# Altium PCB TailLightPrototypeRev3.PcbDoc
Units mil, origin at the board's own origin, x right, y up, seen from the top; angles counter-clockwise.
Board outline 1955 x 1400 mil, 2 copper layers (Top Layer, Bottom Layer); 27 components, 41 nets, 74 pads, 8 vias.
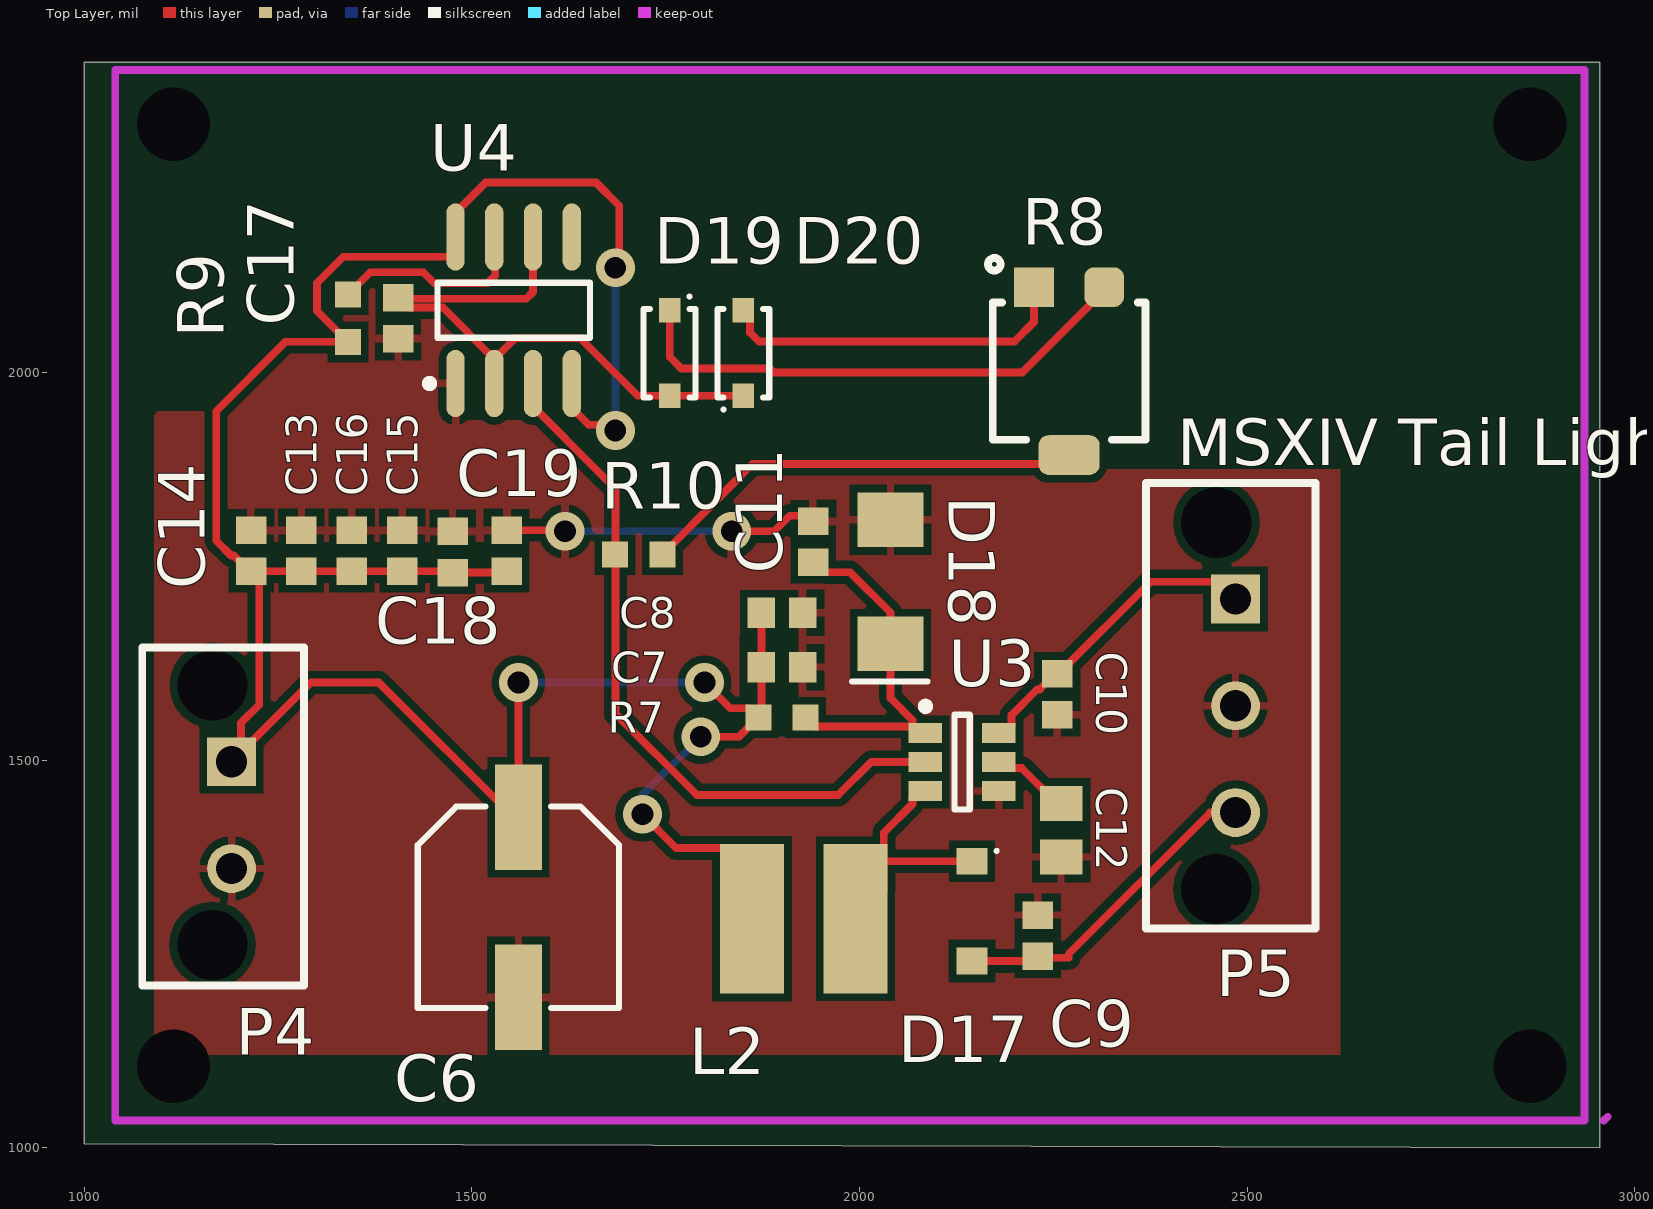
[diagram p0: Top Layer view]
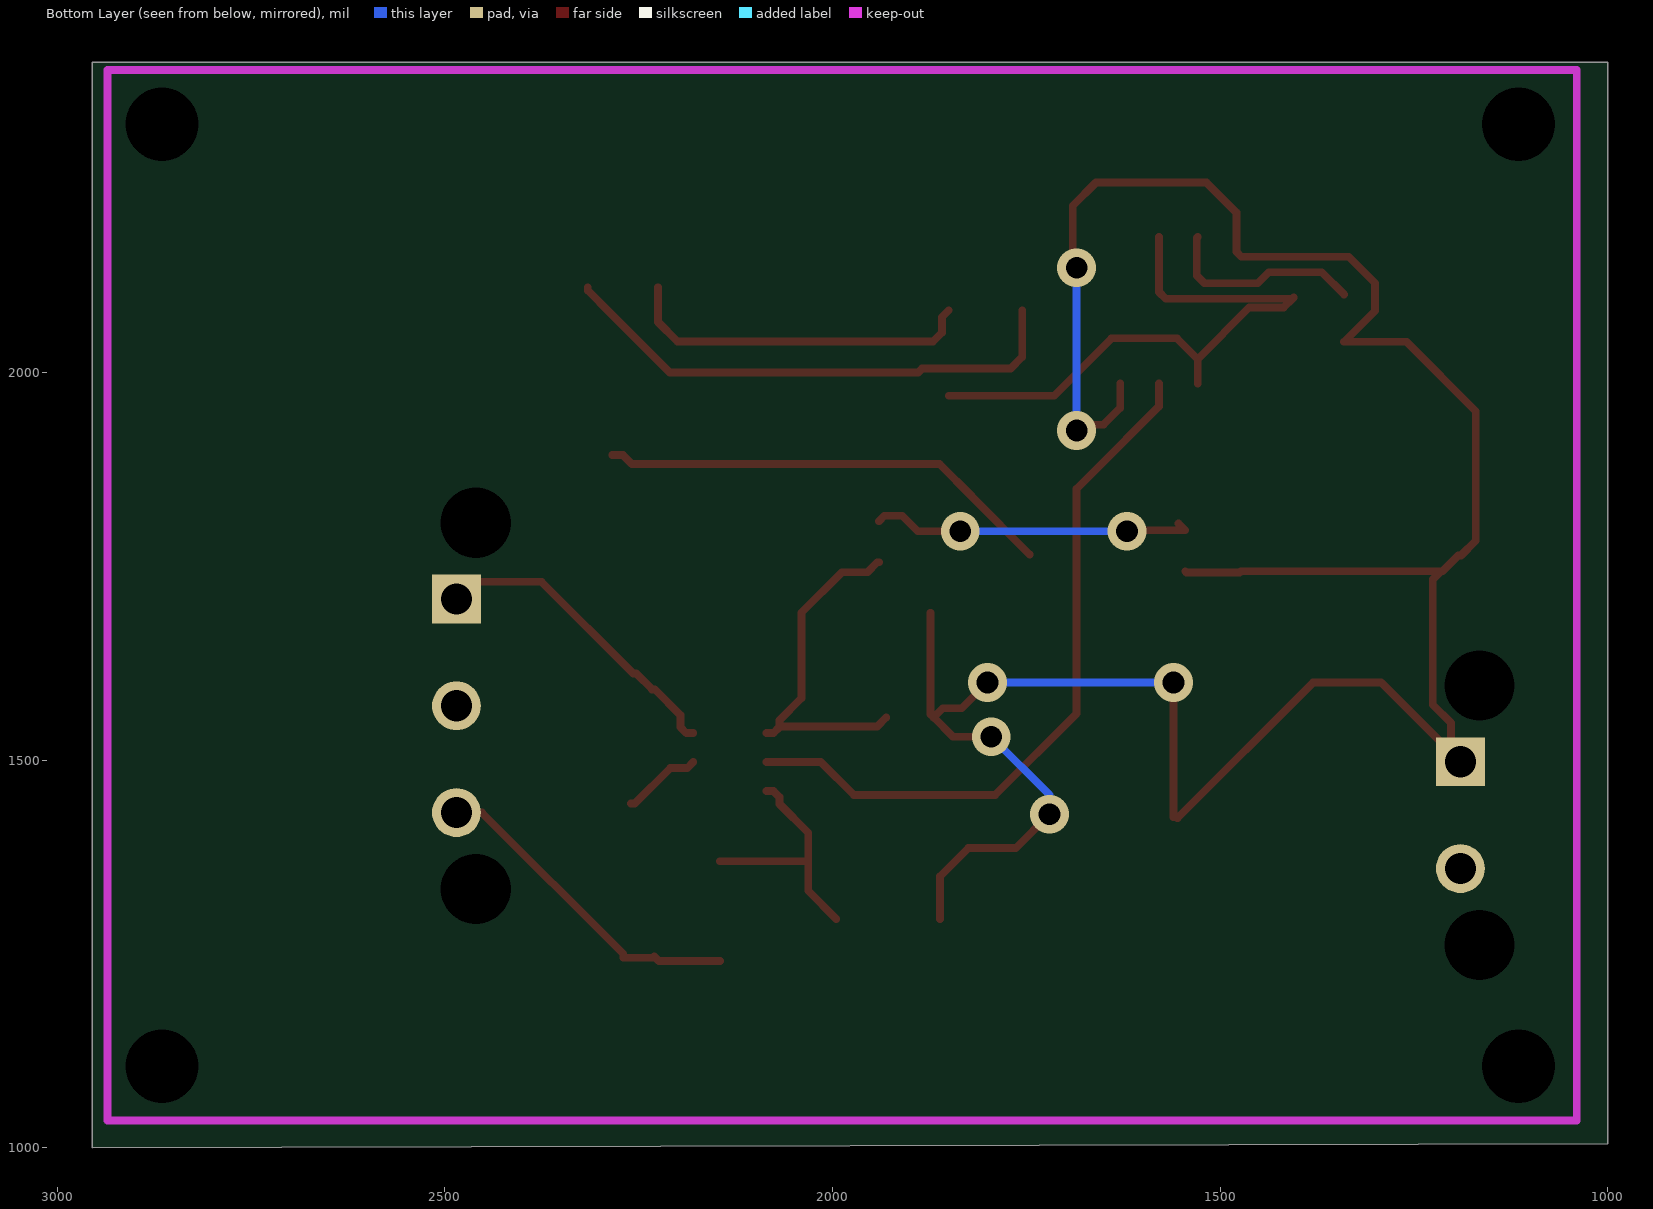
[diagram p1: Bottom Layer view, seen from below]
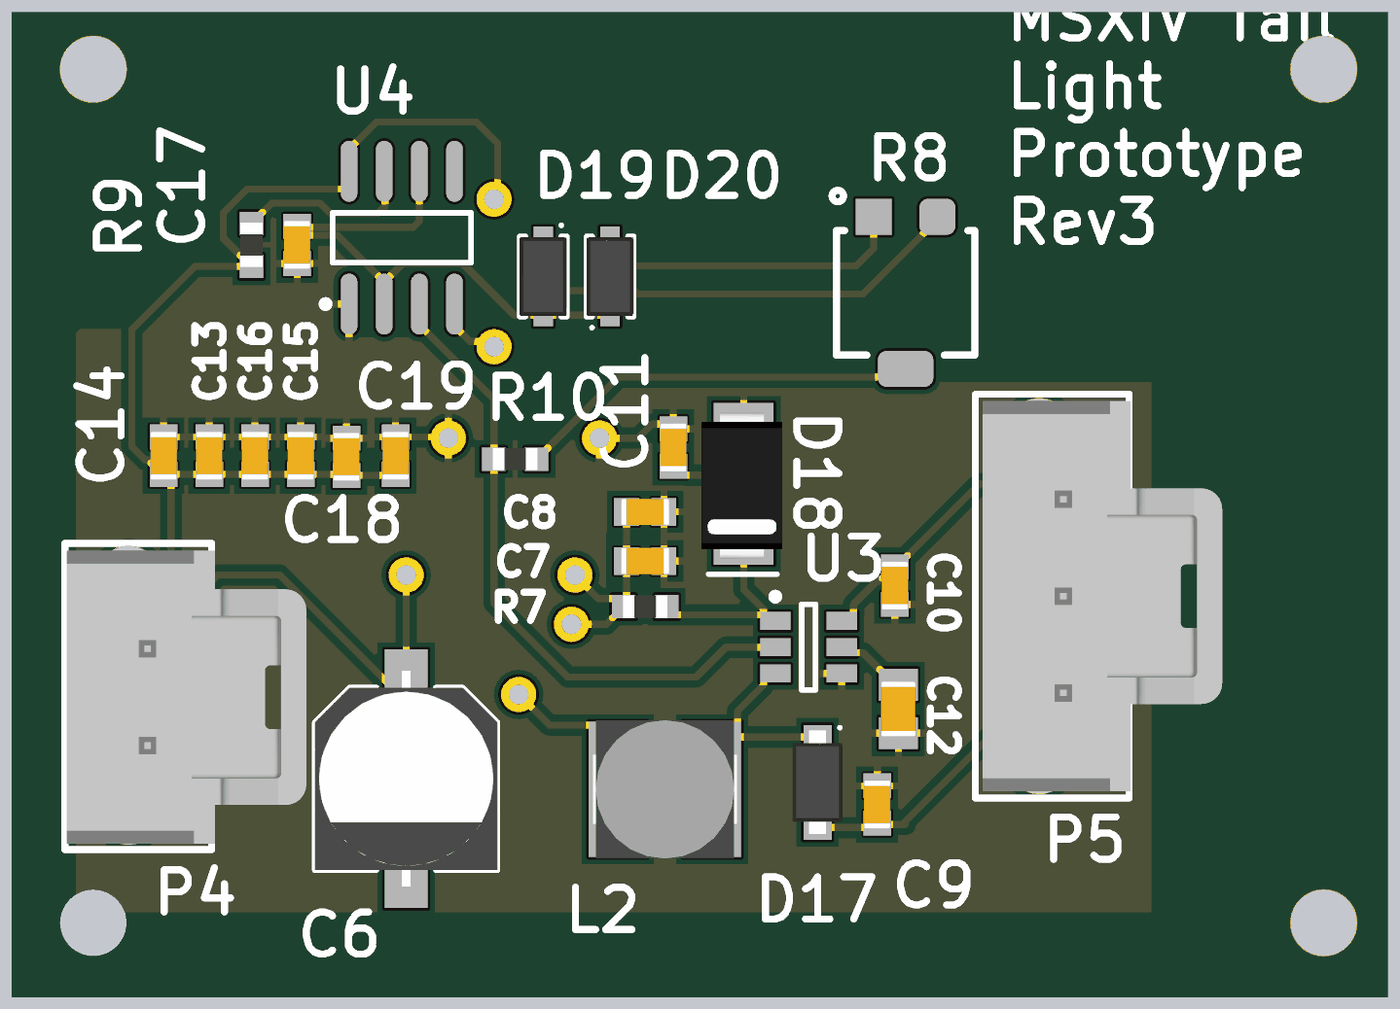
[diagram p2: 3D render of the assembled board from above, using the file's embedded part models]

## Layer stack, top to bottom
Top Solder: solder mask 0.4, Solder Resist, Dk 3.5
Top Layer: signal copper 1.4
Dielectric 1: dielectric 12.6, FR-4, Dk 4.8
Bottom Layer: signal copper 1.4
Bottom Solder: solder mask 0.4, Solder Resist, Dk 3.5

## Board outline
1000,1005 1000,2400 2955,2400 2955,1000
cut-out: 1030,2400

## Design rules (kind name [scope] priority, off if disabled: settings)
Clearance [All] p1: gap=10 ignorepadtopadclearanceinfootprint=FALSE except(0: Arc-Hole Track-Hole SMDPad-Hole THPad-Hole Via-Hole Fill-Hole Poly-Hole Region-Hole Text-Hole)
PolygonConnect [All] p1: connectstyle=Relief reliefconductorwidth=10 reliefentries=4 polygonreliefangle="90 Angle" airgapwidth=10
RoutingVias [All] p1: holewidth=28 width=50 viastyle="Through Hole" minholewidth=28 minwidth=50 maxholewidth=28 maxwidth=50
SolderMaskExpansion [All] p1: expansion=4
Width [All] p1: maxlimit=10 minlimit=10 preferedwidth=10
30 further rules are at their usual default settings.

## Components (designator, comment, footprint, x,y, rotation, side; value= is the part's Value field where it differs from the comment)
C6 "Comment" "CAP ALUM 6.3MM RADIAL SMD" 1560,1310 r270 top
C7 "CAP CER 0.1UF 50V 10% X7R 0603" "CAP, 0603" 1900,1620 r0 top
C8 "CAP CER 4.7UF 25V 10% X5R 0603" "CAP, 0603" 1900,1690 r0 top
C9 "CAP CER 1UF 50V 10% X7R 0603" "CAP, 0603" 2230,1273.43 r90 top
C10 "CAP CER 10nF 50V 5% X7R 0603" "CAP, 0603" 2255,1585 r270 top
C11 "CAP CER 1UF 50V 10% X7R 0603" "CAP, 0603" 1940,1781.57 r90 top
C12 "CAP CER 0.22UF 50V X7R 0805" "CAP, 0805" 2260,1409.45 r270 top
C13 "CAP CER 0.1UF 50V 10% X7R 0603" "CAP, 0603" 1280,1770 r270 top
C14 "CAP CER 0.1UF 50V 10% X7R 0603" "CAP, 0603" 1215,1770 r270 top
C15 "CAP CER 4.7UF 25V 10% X5R 0603" "CAP, 0603" 1410,1770 r270 top
C16 "CAP CER 4.7UF 25V 10% X5R 0603" "CAP, 0603" 1345,1770 r270 top
C17 "CAP CER 6800pF 50V 10% X7R 0603" "CAP, 0603" 1405,2070 r270 top
C18 "CAP CER 0.1UF 50V 10% X7R 0603" "CAP, 0603" 1475,1768.43 r90 top
C19 "CAP CER 4.7UF 25V 10% X5R 0603" "CAP, 0603" 1545,1770 r90 top
D17 "DIODE SCHOTTKY 40V 500MA SOD123" SOD123 2145,1305 r270 top
D18 "DIODE ZENER 16V 5W DO-214AA (SMB)" "DO-214AA Diode" 2040,1810 r270 top
D19 "DIODE GEN PURP 100V 300MA SOD123" "DIODE GEN PURP 100V 300MA SOD123" 1755,2025 r270 top
D20 "DIODE GEN PURP 100V 300MA SOD123" "DIODE GEN PURP 100V 300MA SOD123" 1850,2025 r90 top
L2 "FIXED IND 10UH 1.13A 237 MOHM" INDP5050X20N 1928.07,1295 r0 top
P4 "CONN 2POS ULTRA-FIT 0.138\"" "CONN, 2POS ULTRA-FIT" 1190,1497.8 r270 top
P5 "CONN 3POS ULTRA-FIT 0.138\"" "CONN, 3POS ULTRA-FIT" 2485,1707.8 r270 top
R7 "1K" "RES, 0603" 1900,1555 r0 top
R8 "POT 20k OHM 20% 1/4W" "20K POT" 2270.28,1893.46 r90 top value=20K
R9 "1K" "RES, 0603" 1340,2070 r90 top
R10 "RES 100 OHM 1% 1/10W 0603" "RES, 0603" 1715,1765 r180 top
U3 "IC LED DRIVER RGLTR DIM SOT23-6" SOT23-6_N 2132.24,1497.4 r0 top
U4 "IC OSC SGL TIMER 2.1MHZ 8-SOIC" SOIC8 1555,2080 r90 top

## Footprints (in the part's own frame and the unit in brackets; to place one, negate y for a bottom-side part, rotate by r counter-clockwise, add the part's x,y. Pads: shape width x height; smd on the part's side, far side on the other; paste and mask are expansions set on the pad)
"20K POT" [mm]
  rect 1.3x1.3 smd: 1(5.5,1.15)
  rrect50% 1.3x2 smd: 2(0,0)
  rrect50% 1.3x1.3 smd: 3(5.5,-1.15)
  silkscreen extent 0.5,-2.5 6.46,2.66
"CAP ALUM 6.3MM RADIAL SMD" [mm] "Aluminum Electrolytic Capacitor, Body 6.50x6.50x5.50mm, IPC Low Density"
  rect 3.45x1.55 smd: 1(-2.95,0) 2(2.95,0)
  silkscreen extent -3.3,-3.3 3.3,3.3, body extent -3.9,-3.3 3.9,3.3, height 5.5
"CAP, 0603" [mm] "Chip Capacitor, 2-Leads, Body 1.60x0.81mm, IPC Medium Density"
  rect 0.9x1 smd mask+0.076: 1(-0.675,0) 2(0.675,0)
  body extent -0.87,-0.48 0.87,0.48, height 0.9
"CAP, 0805" [mm] "Chip Capacitor, 2-Leads, Body 2.00x1.25mm, IPC Medium Density"
  rect 1.15x1.4 smd: 1(-0.875,0) 2(0.875,0)
  body extent -1,-0.63 1,0.63, height 1.25
"CONN, 2POS ULTRA-FIT" [mm] "2 Positions Header, Shrouded Connector 0.138\" (3.50mm) Through Hole Gold"
  rect 1.6x1.6 hole 1.02: 1(0,0)
  round 1.6 hole 1.02: 2(3.5,0)
  round 1.6 hole 2.3: ""(-2.5,-0.63) ""(6,-0.63)
  silkscreen extent -3.74,-2.93 7.33,2.37, body extent -3.48,-2.87 7.12,5.79, height 13.85
"CONN, 3POS ULTRA-FIT" [mm]
  rect 1.6x1.6 hole 1.02: 1(0,0)
  round 1.6 hole 1.02: 2(3.5,0) 3(7,0)
  round 0 hole 2.3: ""(-2.5,-0.63) ""(9.5,-0.63)
  silkscreen extent -3.8,-2.93 10.8,2.62, body extent -3.55,-2.67 10.55,5.99, height 13.85
"DIODE GEN PURP 100V 300MA SOD123" [mm] "Diode Standard 100V 300mA (DC) Surface Mount SOD-123"
  rect 0.8x0.7 smd: 1(-1.4,0) 2(1.4,0)
  silkscreen extent -1.9,-0.85 1.45,0.85, body extent -1.43,-0.85 1.43,0.85, height 1.35
"DO-214AA Diode" [mil] "Zener Diode 16V 5W SMBJ5353B-TP"
  rect 70x85 smd: 1(0,0) 2(160,0)
  silkscreen extent 209,-50 209,47, body extent -21,-60 187,55, height 95
INDP5050X20N [mm] "Precision Wire Wound Inductor, 2-Leads, Body 5.00x5.00mm, IPC Medium Density"
  rect 2.1x4.9 smd: 1(-1.7,0) 2(1.7,0)
  body extent -2.6,-2.5 2.6,2.5, height 2.1
"RES, 0603" [mm] "Chip Resistor, 2-Leads, Body 1.60x0.80mm, IPC Medium Density"
  rect 0.85x0.85 smd: 1(-0.775,0) 2(0.775,0)
  body extent -0.8,-0.4 0.8,0.4, height 0.55
SOD123 [mm] "SODFL, 2-Leads, Body 1.60x3.75mm, IPC Medium Density"
  rect 0.88x1.02 smd: 1(-1.635,0) 2(1.635,0)
  silkscreen extent -2.02,0.76 -1.93,0.86, body extent -1.88,-0.9 1.88,0.9, height 1.28
SOIC8 [mm]
  oval 2.2x0.6 smd: 1(-2.394,1.935) 2(-2.394,0.665) 3(-2.394,-0.605) 4(-2.394,-1.875) 5(2.406,-1.875) 6(2.406,-0.605) 7(2.406,0.665) 8(2.406,1.935)
  silkscreen extent -2.52,-2.47 0.91,2.91, body extent -1.99,-2.47 2.01,2.53, height 1.75
SOT23-6_N [mm] "SOT23, 6-Leads, Body 2.9x1.6mm, Pitch 0.95mm, Lead Span 2.7mm, IPC Medium Density"
  rect 1.1x0.65 smd: 1(-1.2,0.95) 2(-1.2,0) 3(-1.2,-0.95) 4(1.2,-0.95) 5(1.2,0) 6(1.2,0.95)
  silkscreen extent -1.32,-1.55 0.25,1.95, body extent -0.9,-1.55 0.9,1.55, height 1.45

## Part data
C7 C13 C14 C18: "0.10µF ±10% 50V Ceramic Capacitor X7R 0603 (1608 Metric)", Capacitance=0.1µF, Manufacturer 1="AVX Corporation", Manufacturer Part Number 1=06035C104KAT2A, Operating Temperature="-55°C ~ 125°C", Package / Case="0603 (1608 Metric)", Ratings=-, Supplier Part Number 1=478-5052-1-ND, Temperature Coefficient=X7R, Tolerance=±10%, Voltage=50V, ComponentLink1Description=http://datasheets.avx.com/X7RDielectric.pdf, ComponentLink1URL=http://datasheets.avx.com/X7RDielectric.pdf, Height - Seated (Max)=-, Lead Spacing=-, Lead Style=-, Mounting Type="Surface Mount, MLCC", Packaging="Cut Tape (CT)", Part Status=Active, Size / Dimension="0.063\" L x 0.032\" W (1.60mm x 0.81mm)", Supplier 1=Digi-Key, Thickness (Max)="0.035\" (0.90mm)"
C8 C15 C16 C19: "4.7µF ±10% 25V Ceramic Capacitor X5R 0603 (1608 Metric)", Capacitance=4.7µF, Manufacturer 1="Murata Electronics North America", Manufacturer Part Number 1=GRM188R61E475KE11D, Operating Temperature="-55°C ~ 85°C", Package / Case="0603 (1608 Metric)", Ratings=-, Supplier Part Number 1=490-7203-1-ND, Temperature Coefficient=X5R, Tolerance=±10%, Voltage=25V, ComponentLink1Description=http://www.murata.com/~/media/webrenewal/support/library/catalog/products/capacitor/mlcc/c02e.ashx, ComponentLink1URL=http://www.murata.com/~/media/webrenewal/support/library/catalog/products/capacitor/mlcc/c02e.ashx, Height - Seated (Max)=-, Lead Spacing=-, Lead Style=-, Mounting Type="Surface Mount, MLCC", Packaging="Cut Tape (CT)", Part Status=Active, Size / Dimension="0.063\" L x 0.031\" W (1.60mm x 0.80mm)", Supplier 1=Digi-Key, Thickness (Max)="0.031\" (0.80mm)"
C9 C11: "1µF ±10% 50V Ceramic Capacitor X7R 0603 (1608 Metric)", Capacitance=1µF, Manufacturer 1="Taiyo Yuden", Manufacturer Part Number 1=UMK107AB7105KA-T, Operating Temperature="-55°C ~ 125°C", Package / Case="0603 (1608 Metric)", Ratings=-, Supplier Part Number 1=587-3247-1-ND, Temperature Coefficient=X7R, Tolerance=±10%, Voltage=50V, ComponentLink1Description=http://www.yuden.co.jp/productdata/catalog/en/mlcc_all_e.pdf, ComponentLink1URL=http://www.yuden.co.jp/productdata/catalog/en/mlcc_all_e.pdf, Height - Seated (Max)=-, Lead Spacing=-, Lead Style=-, Mounting Type="Surface Mount, MLCC", Packaging="Cut Tape (CT)", Part Status=Active, Size / Dimension="0.063\" L x 0.031\" W (1.60mm x 0.80mm)", Supplier 1=Digi-Key, Thickness (Max)="0.037\" (0.95mm)"
C10: "10000pF ±5% 50V Ceramic Capacitor U2J 0603 (1608 Metric)", Capacitance=10000pF, Manufacturer 1=KEMET, Manufacturer Part Number 1=C0603C103J5JAC7867, Operating Temperature="-55°C ~ 125°C", Package / Case="0603 (1608 Metric)", Ratings=-, Supplier Part Number 1=399-13384-1-ND, Temperature Coefficient=U2J, Tolerance=±5%, Voltage=50V, ComponentLink1Description=http://www.kemet.com/docfinder?Partnumber=C0603C103J5JAC7867, ComponentLink1URL=http://www.kemet.com/docfinder?Partnumber=C0603C103J5JAC7867, Failure Rate=-, Height - Seated (Max)=-, Lead Spacing=-, Lead Style=-, Mounting Type="Surface Mount, MLCC", Packaging="Cut Tape (CT)", Part Status=Active, Size / Dimension="0.063\" L x 0.032\" W (1.60mm x 0.80mm)", Supplier 1=Digi-Key, Thickness (Max)="0.034\" (0.87mm)"
C12: Capacitance=220nF, Case/Package=0805, Case Code (Metric)=2012, Dielectric=X7R, Manufacturer=Samsung, Manufacturer Part Number=CL21B224KBFNNNE, Max Operating Temperature=125°C, Min Operating Temperature=-55°C, Package Quantity=1, Supplier Part Number 1=1276-1093-6-ND, Tolerance=10%, Voltage=50V, Case Code (Imperial)=0805, ComponentLink1Description=https://www.verical.com/server-webapp/html/getDatasheet?partID=358363&src-supplier=Verical, ComponentLink1URL=https://www.verical.com/server-webapp/html/getDatasheet?partID=358363&src-supplier=Verical, Contact Plating=Tin, Depth=1.25mm, Height=1.25mm, Lead Free="Lead Free", Length=2mm, Mount="Surface Mount", Packaging="Tape and Reel", Pricing 1="1=0.11, 10=0.077, 100=0.0361, 500=0.02532, 1000=0.02096 (USD)", Radiation Hardening=No, Stock 1=219478, Supplier 1=Digi-Key, Thickness=0.053inch, Voltage Rating=50V, Voltage Rating (DC)=50V, Width=0.049inch
C17: "6800pF ±10% 50V Ceramic Capacitor X7R 0603 (1608 Metric)", Capacitance=6800pF, Manufacturer 1="Samsung Electro-Mechanics America, Inc.", Manufacturer Part Number 1=CL10B682KB8SFNC, Operating Temperature="-55°C ~ 125°C", Package / Case="0603 (1608 Metric)", Ratings=-, Supplier Part Number 1=1276-2103-1-ND, Temperature Coefficient=X7R, Tolerance=±10%, Voltage=50V, ComponentLink1Description=http://www.samsungsem.com/kr/support/product-search/mlcc/CL10B682KB8SFNC.jsp, ComponentLink1URL=http://www.samsungsem.com/kr/support/product-search/mlcc/CL10B682KB8SFNC.jsp, Height - Seated (Max)=-, Lead Spacing=-, Lead Style=-, Mounting Type="Surface Mount, MLCC", Packaging="Cut Tape (CT)", Part Status=Active, Size / Dimension="0.063\" L x 0.031\" W (1.60mm x 0.80mm)", Supplier 1=Digi-Key, Thickness (Max)="0.035\" (0.90mm)"
D17: "Diode Schottky 40V 500mA Surface Mount SOD-123", Average Rectified Current=500mA, Current Rating=500A, Forward Voltage=620mV, Manufacturer="ON Semiconductor / Fairchild", Manufacturer Part Number=MBR0540, Max Forward Surge Current (Ifsm)=5.5A, Max Operating Temperature=125°C, Max Repetitive Reverse Voltage (Vrrm)=40V, Max Reverse Leakage Current=20uA, Min Operating Temperature=-65°C, Package Quantity=3000, Power Dissipation=400mW, Supplier Part Number 1=MBR0540DKR-ND, ComponentLink1Description=datasheet, ComponentLink1URL=https://www.onsemi.cn/PowerSolutions/document/MBR0540-D.pdf, ComponentLink2Description="supplier link", ComponentLink2URL=https://www.onsemi.com/PowerSolutions/product.do?id=MBR0540, ComponentLink3Description=https://www.fairchildsemi.com/datasheets/MB/MBR0540.pdf?src-supplier=Digi-Key, ComponentLink3URL=https://www.fairchildsemi.com/datasheets/MB/MBR0540.pdf?src-supplier=Digi-Key, ComponentLink4Description=https://www.onsemi.cn/PowerSolutions/document/MBR0540-D.pdf?src-supplier=Digi-Key, ComponentLink4URL=https://www.onsemi.cn/PowerSolutions/document/MBR0540-D.pdf?src-supplier=Digi-Key, ComponentLink5Description=http://www.jameco.com/Jameco/Products/ProdDS/975060.pdf?src-supplier=Jameco, ComponentLink5URL=http://www.jameco.com/Jameco/Products/ProdDS/975060.pdf?src-supplier=Jameco, ComponentLink6Description=http://www.mouser.com/ds/2/149/MBR0540-90522.pdf?src-supplier=Mouser, ComponentLink6URL=http://www.mouser.com/ds/2/149/MBR0540-90522.pdf?src-supplier=Mouser, ComponentLink7Description=https://www.verical.com/server-webapp/html/getDatasheet?partID=110131&src-supplier=Verical, ComponentLink7URL=https://www.verical.com/server-webapp/html/getDatasheet?partID=110131&src-supplier=Verical, ComponentLink8Description=http://www.farnell.com/datasheets/2041480.pdf?src-supplier=Element14, ComponentLink8URL=http://www.farnell.com/datasheets/2041480.pdf?src-supplier=Element14, ComponentLink9Description=https://www.fairchildsemi.com/datasheets/MB/MBR0540.pdf?src-supplier=Avnet, ComponentLink9URL=https://www.fairchildsemi.com/datasheets/MB/MBR0540.pdf?src-supplier=Avnet, Contact Plating=Tin,Matte, Element Configuration=Single, Forward Current=500mA, Height=1.03mm, Lead Free="Lead Free", Length=2.7mm, Max Reverse Voltage (DC)=40V, Max Surge Current=5.5A, Mount="Surface Mount", Number of Pins=2, Output Current=500mA, Packaging="Tape and Reel", Peak Non-Repetitive Surge Current=5.5A, Peak Reverse Current=20uA, Polarity=Standard, Pricing 1="1=0.2, 10=0.166, 100=0.0881, 500=0.05794, 1000=0.0394 (USD)", Radiation Hardening=No, REACH SVHC="No SVHC", Stock 1=414620, Supplier 1=Digi-Key, Voltage Rating (DC)=40V, Weight=0.03g, Width=1.6mm
D18: "Zener Diode 16V 5W ±5% Surface Mount DO-214AA (SMB)", Manufacture="Micro Commercial Co", Manufacture Part Number=SMBJ5353B-TP, Power (Max)=5W, Supplier Part Number 1=SMBJ5353B-TPMSCT-ND, Voltage - Forward="1.2V @ 1A", Voltage - Zener (Nom)=16V, Impedence (Max)="2.5 Ohm", Supplier 1=Digi-Key
D19 D20: "Diode Standard 100V 300mA (DC) Surface Mount SOD-123", Case/Package=SOD-123-2, Forward Current=300mA, Forward Voltage=1.25V, Manufacturer="Diodes Zetex", Manufacturer Part Number=1N4148WQ-7-F, Max Operating Temperature=150°C, Max Power Dissipation=400mW, Max Repetitive Reverse Voltage (Vrrm)=100V, Max Surge Current=2A, Min Operating Temperature=-65°C, Package Quantity=3000, Peak Reverse Current=50uA, Supplier Part Number 1=1N4148WQ-7-FDICT-ND, ComponentLink1Description=http://components.arrow.com/part/dataview/0323_07206809, ComponentLink1URL=http://components.arrow.com/part/dataview/0323_07206809, ComponentLink2Description=http://www.diodes.com/datasheets/ds30086.pdf, ComponentLink2URL=http://www.diodes.com/datasheets/ds30086.pdf, ComponentLink3Description=http://www.mouser.com/ds/2/115/ds30086-318161.pdf, ComponentLink3URL=http://www.mouser.com/ds/2/115/ds30086-318161.pdf, Contact Plating=Tin,Matte, Element Configuration=Single, Lead Free="Lead Free", Mount="Surface Mount", Number of Pins=2, Packaging="Tape and Reel", Peak Non-Repetitive Surge Current=2A, Pricing 1="1=0.22, 10=0.196, 100=0.107, 500=0.0658, 1000=0.0449 (USD)", Recovery Time=4ns, Reverse Recovery Time=4ns, Stock 1=229, Supplier 1=Digi-Key, Weight=0.000353oz
L2: "10µH Shielded Wirewound Inductor 1.13A 237mOhm Max Nonstandard", Case/Package=2020, Current Rating=1.13A, DC Resistance (DCR)=237mR, Inductance=10uH, Inductance Tolerance=20%, Manufacturer=TDK, Manufacturer Part Number=VLCF5020T-100M1R1-1, Max Operating Temperature=105°C, Min Operating Temperature=-40°C, Package Quantity=500, RMS Current (Irms)=1.5A, Supplier Part Number 1=445-3209-2-ND, Test Frequency=100kHz, ComponentLink1Description=http://www.onlinecomponents.com/productFiles/mf-TDK/e531_vlcf5020_1.pdf?src-supplier=Onlinecomponents.com, ComponentLink1URL=http://www.onlinecomponents.com/productFiles/mf-TDK/e531_vlcf5020_1.pdf?src-supplier=Onlinecomponents.com, ComponentLink2Description=http://www.mouser.com/ds/2/400/e531_vlcf-18500.pdf?src-supplier=Mouser, ComponentLink2URL=http://www.mouser.com/ds/2/400/e531_vlcf-18500.pdf?src-supplier=Mouser, ComponentLink3Description=http://www.farnell.com/datasheets/516785.pdf?src-supplier=Element14, ComponentLink3URL=http://www.farnell.com/datasheets/516785.pdf?src-supplier=Element14, ComponentLink4Description=http://uk.rs-online.com/webdocs/1538/0900766b81538dbe.pdf?src-supplier=RSComponents, ComponentLink4URL=http://uk.rs-online.com/webdocs/1538/0900766b81538dbe.pdf?src-supplier=RSComponents, ComponentLink5Description=https://www.verical.com/server-webapp/html/getDatasheet?partID=107508&src-supplier=Verical, ComponentLink5URL=https://www.verical.com/server-webapp/html/getDatasheet?partID=107508&src-supplier=Verical, Composition=Wirewound, Core Material=Ferrite, DC Current=1.13A, Depth=5.2mm, Height=2mm, Height - Seated (Max)=0.079inch, Lead Free="Lead Free", Length=0.197inch, Max DC Current=1.13A, Military Standard=Not, Mount="Surface Mount", Number of Pins=2, Packaging="Tape and Reel", Pricing 1="500=0.441, 1000=0.357, 2500=0.336, 5000=0.3255, 12500=0.315, 25000=0.3045 (USD)", Radiation Hardening=No, REACH SVHC="No SVHC", Saturation Current=1.13A, Shielding=Shielded, Stock 1=12500, Supplier 1=Digi-Key, Termination=SMD/SMT, Tolerance=20%, Width=0.197inch
P4: "Connector Header Through Hole 2 position 0.138\" (3.50mm)", Color=Black, Manufacturer=Molex, Manufacturer Part Number=1722871102, Supplier Part Number 1=WM11701-ND, ComponentLink1Description=http://www.molex.com/pdm_docs/sd/1722861302_sd.pdf, ComponentLink1URL=http://www.molex.com/pdm_docs/sd/1722861302_sd.pdf, Connector Type="Male Pin", Contact Plating=Tin, Fastening Type=Latch, Mount="Through Hole", Number of Positions=2, Number of Rows=1, Packaging=Tray, Pitch=0.138inch, Pricing 1="1 = 0.78000, 10 = 0.68800, 100 = 0.59380, 500 = 0.48582, 1000 = 0.43184, 5000 = 0.37786, 10000 = 0.35897 (USD)", RoHS=Yes, Series=UltraFit, Stock 1=2743, Supplier 1=Digi-Key, Termination=Solder
P5: "3 Positions Header Connector 0.138\" (3.50mm) Through Hole Tin", Current Rating=-, Insulation Color=Black, Manufacturer 1="Molex, LLC", Manufacturer Part Number 1=1722871103, Material Flammability Rating="UL94 V-0", Operating Temperature="-40°C ~ 105°C", Supplier Part Number 1=WM11702-ND, Voltage=400V, ComponentLink1Description=http://www.molex.com/pdm_docs/sd/1722871103_sd.pdf, ComponentLink1URL=http://www.molex.com/pdm_docs/sd/1722871103_sd.pdf, Connector Type=Header, Contact Finish - Mating=Tin, Contact Finish - Post=Tin, Contact Finish Thickness - Mating="60µin (1.52µm)", Contact Finish Thickness - Post="60µin (1.52µm)", Contact Length - Mating=-, Contact Length - Post="0.126\" (3.20mm)", Contact Material="Copper Alloy", Contact Shape=Square, Contact Type="Male Pin", Fastening Type="Latch Holder", Ingress Protection=-, Insulation Height="0.465\" (11.80mm)", Insulation Material="Liquid Crystal Polymer (LCP)", Mated Stacking Heights=26.99mm, Mounting Type="Through Hole", Number of Positions=3, Number of Positions Loaded=All, Number of Rows=1, Overall Contact Length=-, Packaging=Tray, Part Status=Active, Pitch - Mating="0.138\" (3.50mm)", Row Spacing - Mating=-, Series=UltraFit, Shrouding="Shrouded - 4 Wall", Style="Board to Cable/Wire", Supplier 1=Digi-Key, Termination=Solder
R7 R9: library part "RES 1K OHM 5% 1/10W 0603", "1k Ohm ±5% 0.1W, 1/10W Chip Resistor 0603 (1608 Metric)", Manufacturer=Yageo, Manufacturer Part Number=RC0603JR-071KL, Operating Temperature="-55°C ~ 155°C", Package / Case="0603 (1608 Metric)", Power (Watts)="0.1W, 1/10W", Resistance (Ohms)=1k, Supplier Device Package=0603, Supplier Part Number 1=311-1.0KGRCT-ND, Temperature Coefficient=±100ppm/°C, Tolerance=±5%, Category=Resistors, ComponentLink1Description=http://www.yageo.com/documents/recent/PYu-RC_Group_51_RoHS_L_7.pdf, ComponentLink1URL=http://www.yageo.com/documents/recent/PYu-RC_Group_51_RoHS_L_7.pdf, Composition="Thick Film", Failure Rate=-, Features="Moisture Resistant", Height - Seated (Max)="0.022\" (0.55mm)", Packaging="Cut Tape (CT)", Part Status=Active, Pricing 1="1=0.15, 10=0.017, 100=0.0071, 1000=0.0032, 2500=0.00278 (CAD)", RoHS="RoHS Compliant", Size / Dimension="0.063\" L x 0.031\" W (1.60mm x 0.80mm)", Stock 1=4415240, Supplier 1=Digi-Key
R8: "20k Ohm 0.25W, 1/4W Gull Wing Surface Mount Trimmer Potentiometer", Manufacture="TT Electronics/BI", Manufacture Part Number=23BR20KLFTR, Power=1/4W, Supplier Part Number 1=987-1016-1-ND, Tolerence=20%, Adjustment Type=Top, Supplier 1=Digi-Key, Turns=1
R10: "100 Ohm ±1% 0.1W, 1/10W Chip Resistor 0603 (1608 Metric) Moisture Resistant Thick Film", Manufacturer 1=Yageo, Manufacturer Part Number 1=RC0603FR-07100RL, Operating Temperature="-55°C ~ 155°C", Package / Case="0603 (1608 Metric)", Power=1/10W, Resistance=100, Supplier Device Package=0603, Supplier Part Number 1=311-100HRCT-ND, Temperature Coefficient=±100ppm/°C, Tolerance=±1%, ComponentLink1Description=http://www.yageo.com/documents/recent/PYu-RC_Group_51_RoHS_L_7.pdf, ComponentLink1URL=http://www.yageo.com/documents/recent/PYu-RC_Group_51_RoHS_L_7.pdf, Composition="Thick Film", Failure Rate=-, Height - Seated (Max)="0.022\" (0.55mm)", Packaging="Cut Tape (CT)", Part Status=Active, Size / Dimension="0.063\" L x 0.031\" W (1.60mm x 0.80mm)", Supplier 1=Digi-Key
U3: "LED Driver IC 1 Output DC DC Regulator Step-Up (Boost) PWM Dimming 1.2A (Switch) SOT-23-6", Case/Package=SOT-23-6, Frequency=1.2MHz, Manufacturer="Texas Instruments", Manufacturer Part Number=TPS61165TDBVRQ1, Max Input Voltage=18V, Max Operating Temperature=105°C, Max Supply Current=2.3mA, Min Input Voltage=3V, Min Operating Temperature=-40°C, Output Current=1.2A, Output Voltage=38V, Package Quantity=3000, Quiescent Current=1.5mA, Supplier Part Number 1=TPS61165TDBVRQ1-ND, ComponentLink1Description=datasheet, ComponentLink1URL=http://www.ti.com/lit/ds/symlink/tps61165.pdf, ComponentLink2Description=http://www.ti.com/lit/gpn/tps61165-q1?src-supplier=Mouser, ComponentLink2URL=http://www.ti.com/lit/gpn/tps61165-q1?src-supplier=Mouser, ComponentLink3Description=https://www.verical.com/server-webapp/html/getDatasheet?partID=676299&src-supplier=Verical, ComponentLink3URL=https://www.verical.com/server-webapp/html/getDatasheet?partID=676299&src-supplier=Verical, ComponentLink4Description=http://www.ti.com/lit/ds/symlink/tps61165-q1.pdf?src-supplier=Digi-Key, ComponentLink4URL=http://www.ti.com/lit/ds/symlink/tps61165-q1.pdf?src-supplier=Digi-Key, Dimming=PWM, Lead Free="Lead Free", Max Supply Voltage=18V, Min Supply Voltage=3V, Number of Channels=1, Number of Outputs=1, Number of Pins=6, Number of Segments=3, Output Current per Channel=1.2A, Packaging="Tape and Reel", Radiation Hardening=No, Stock 1=0, Supplier 1=Digi-Key, Topology=Boost
U4: "555 Type, Timer/Oscillator (Single) IC 2.1MHz 8-SOIC", Case/Package=SOIC, Frequency=2.1MHz, High Level Output Current=-10mA, Low Level Output Current=100mA, Manufacturer="Texas Instruments", Manufacturer Part Number=TLC555QDRQ1, Max Operating Temperature=125°C, Max Power Dissipation=725mW, Max Supply Voltage=15V, Min Operating Temperature=-40°C, Min Supply Voltage=2V, Nominal Supply Current=170uA, Operating Supply Current=360uA, Package Quantity=2500, Supplier Part Number 1=296-22999-2-ND, ComponentLink1Description=http://focus.ti.com/lit/ds/symlink/tlc555-q1.pdf?src-supplier=Avnet, ComponentLink1URL=http://focus.ti.com/lit/ds/symlink/tlc555-q1.pdf?src-supplier=Avnet, ComponentLink2Description=http://www.farnell.com/datasheets/1806066.pdf?src-supplier=Element14, ComponentLink2URL=http://www.farnell.com/datasheets/1806066.pdf?src-supplier=Element14, ComponentLink3Description=https://www.verical.com/server-webapp/html/getDatasheet?partID=297376&src-supplier=Verical, ComponentLink3URL=https://www.verical.com/server-webapp/html/getDatasheet?partID=297376&src-supplier=Verical, ComponentLink4Description=http://www.ti.com/lit/ds/symlink/tlc555-q1.pdf?src-supplier=Digi-Key, ComponentLink4URL=http://www.ti.com/lit/ds/symlink/tlc555-q1.pdf?src-supplier=Digi-Key, Contact Plating=Gold, Lead Free="Lead Free", Mount="Surface Mount", Number of Pins=8, Number of Timers/Counters=1, Packaging="Tape and Reel", Power Dissipation=725mW, Pricing 1="2500=0.3528, 5000=0.33516, 12500=0.32256 (USD)", Quiescent Current=170uA, Radiation Hardening=No, REACH SVHC="No SVHC", Stock 1=60000, Supplier 1=Digi-Key, Weight=0.002561oz

## Free pads (board coordinates)
  round 60 hole 94.49 unplated: 2(1115,1105)
  round 60 hole 94.49: 3(2865,1105) 4(1115,2320) 7(2865,2320)

## Via types
v1: diameter 50, hole 28, Top Layer to Bottom Layer, 8 vias

## Nets (pads, with @x,y where several pads share a name; then routed paths per layer and width w, separated by ;. In a path a pad name is that pad's centre, name@x,y a point inside that pad or via, vN(x,y) a via of type N, cw(c..) or ccw(c..) an arc to the next point about the centre after c; other vN are vias at no path point)
6V6: 
CTRL: R10.2 U3.2 U4.3 | length 930.8
  Top Layer w10: U4.3 1578.82,1956.18 1665,1870 1685,1850 1685,1560 1790,1455 1972.6,1455 2015,1497.4 U3.2
FB: C10.1 P5.1 U3.6 | length 404.7
  Top Layer w10: U3.6 2188.35,1534.8 2196.14,1542.6 2196.14,1558.18 2229.1,1591.14 2232.6,1591.14 2253.03,1611.57 C10.1 2256.97,1611.57 2375.39,1730 2462.8,1730 P5.1
GND: C6.2 C7.2 C8.2 C9.2 C10.2 C11.2 C12.2 C13.1 C14.1 C15.1 C16.1 C17.2 C18.2 C19.2 D18.1 P4.2 P5.2 pad.2 U3.4 U4.1 | length 403.7
  Top Layer w10: C19.2@1553.43,1805 C19.2 1618.43,1796.57 v1(1620,1795) ; v1(1835,1795) 1890,1795 1910,1815 1933.15,1815 C11.2
  Bottom Layer w10: v1(1620,1795) v1@1820,1795
NetC2_1: 
NetC3_1: 
NetC4_1: 
NetC5_2: 
NetC9_1: C9.1 D17.2 P5.3 | length 423.8
  Top Layer w10: D17.2 2223.78,1240.63 C9.1 2231.85,1245 2270,1245 2270,1250 2452.2,1432.2 P5.3
NetC11_1: C11.1 D18.2 R7.2 U3.1 | length 448.9
  Top Layer w10: R7.2 1942.24,1543.27 2067.68,1543.27 U3.1@2068.35,1542.6 ; C11.1 1941.97,1755 1954.69,1742.28 1987.72,1742.28 2040,1690 D18.2 2040,1579.8 2068.35,1551.46 U3.1@2068.35,1542.6 ; U3.1 2076.14,1534.8 U3.1@2068.35,1542.6
NetC12_1: C12.1 U3.5 | length 102.7
  Top Layer w10: U3.5 2187.28,1489.61 2209.37,1489.61 2255.08,1443.9 C12.1
NetC17_1: C17.1 D19.2 D20.1 U4.2 U4.6 | length 798.1
  Top Layer w10: C17.1 C17.1@1406.57,2095 ; U4.2 U4.2@1528.82,2017.24 ; U4.6 1578.82,2103.82 1570,2095 C17.1@1406.57,2095 ; D19.2 D19.2@1754.88,1970 ; D20.1@1850,1970 D19.2@1754.88,1970 ; C17.1@1406.57,2095 1417.72,2083.86 1462.2,2083.86 U4.2@1528.82,2017.24 ; U4.2@1528.82,2017.24 1555.63,2044.06 1639.92,2044.06 1713.98,1970 D19.2@1754.88,1970
NetD1_3: 
NetD2_3: 
NetD3_3: 
NetD4_3: 
NetD7_3: 
NetD8_3: 
NetD9_1: 
NetD10_3: 
NetD12_3: 
NetD13_3: 
NetD14_3: 
NetD15_1: 
NetD16_2: 
NetD19_1: D19.1 R8.3 | length 677.1
  Top Layer w10: D19.1 1755,2020 1770,2005 1884.38,2005 1889.38,2000 2210,2000 2285.63,2075.63 2285.63,2075.86 2315.55,2105.78 R8.3
NetD20_2: D20.2 R8.1 | length 458.7
  Top Layer w10: D20.2 1858.78,2071.34 1858.78,2051.34 1870.12,2040 2200,2040 2225,2065 R8.1
NetD21_3: 
NetD22_3: 
NetD23_3: 
NetD24_3: 
NetD25_3: 
NetR2_2: 
NetR3_2: 
NetR4_2: 
NetR8_2: R8.2 R10.1 | length 592.1
  Top Layer w10: R10.1 1820,1839.49 1820,1840 1861.73,1881.73 2258.54,1881.73 R8.2 R8.2@2284.06,1893.46
NetR9_2: R9.2 U4.7 | length 262.2
  Top Layer w10: R9.2 1368.78,2129.29 1437.24,2129.29 1451.54,2115 1520,2115 1530,2125 1530,2173.54 U4.7
SW: D17.1 L2.2 U3.3 | length 321.1
  Top Layer w10: L2.2 2031.34,1331.34 L2.2@2031.34,1369.37 ; U3.3 2076.14,1460 2068.35,1452.2 2068.35,1443.35 2031.34,1406.34 L2.2@2031.34,1369.37 ; D17.1 L2.2@2031.34,1369.37
VBAT: C6.1 C7.1 C8.1 C13.2 C14.2 C15.2 C16.2 C18.1 C19.1 L2.1 P4.1 R7.1 R9.1 U4.4 U4.8 | length 3538
  Top Layer w10: P4.1 P4.1@1202.11,1509.9 ; C19.1 1543.43,1741.85 C18.1 1473.43,1743.43 C15.2 C16.2 C13.2 C14.2 ; C6.1@1555,1425 1380,1600 1292.2,1600 P4.1@1202.11,1509.9 ; C6.1 v1(1560,1600) ; U4.4 1628.82,1954.25 1650.42,1932.65 1677.35,1932.65 v1(1685,1925) ; v1(1685,2135) 1690,2140 1690,2215 1660,2245 1517.6,2245 1478.82,2206.22 U4.8 1478.82,2155.58 1472.53,2149.29 1334.1,2149.29 1300,2115.19 1300,2079.49 R9.1 1259.49,2039.49 1170,1950 1170,1782.96 1189.1,1763.86 1192.6,1763.86 1213.03,1743.43 C14.2 ; v1(1720,1430) 1763.54,1386.46 1824.8,1386.46 1861.14,1350.12 L2.1 ; v1(1795,1530) 1844.49,1530 R7.1 ; v1(1800,1600) 1833.27,1566.73 1857.76,1566.73 R7.1 ; C8.1 C7.1 1873.43,1558.94 R7.1 ; P4.1@1202.11,1509.9 1202.11,1547.89 1225.47,1571.25 1225.47,1732.95 C14.2
  Bottom Layer w10: v1@1570,1600 v1(1800,1600) ; v1(1685,1925) v1(1685,2135) ; v1(1720,1430) 1720,1455 v1(1795,1530)
VDD: 
VIN: 
pads on no net: P4. P5. U4.5

## Polygon pours and split planes (outlines as drawn)
GND on Top Layer (solid, pour order 4): 1090,2255 2620,2255 2620,1120 1090,1120

## Keep-outs
Top Layer:
  lines w10: 2960,1035 2965,1040
Keep-Out Layer:
  lines w10: 1040,1035 2935,1035 2935,2390 1040,2390 1040,1035

## Other copper
Top Layer:
  pour cut-out: 1190,1780 1191.28,1781.28 1574.68,1781.28 1574.68,1755.32 1575,1755 1569.32,1749.32 1185.32,1749.32
  pour cut-out: 1563.09,1938.53 1494.54,1938.53 1490,1943.07 1490,2005 1565,2005
  pour cut-out: 1844.49,1660.32 1921.57,1660.32 1921.57,1531.57 1920,1530 1844.49,1530
  pour cut-out: 2620,2255 2620,1875 1855,1875 1765,1785 1758.27,1791.73 1700.29,1791.73 1700.29,1850 1492.61,2057.69 1492.61,2130.38 1617.22,2255
  pour cut-out: 1501.35,2250.38 1496.73,2255 1090,2255 1090,1945 1095,1950 1154.71,1950 1154.71,1954.69 1254.8,2054.78 1296.54,2054.78 1296.54,2057.49 1298.46,2059.4 1284.71,2073.15 1284.71,2115.19 1289.19,2119.67 1289.19,2126 1327.77,2164.59 1456.58,2164.59 1456.58,2205.61

## Silkscreen, mask and mechanical layers (free items; w line width, h text height)
Top Overlay:
  text "MSXIV Tail Light Prototype Rev3" at 2410,1880 h60